# Altium PCB PCB-NODE-V1.0.PcbDoc
Units mm, origin at the board's own origin, x right, y up, seen from the top; angles counter-clockwise.
Board outline 75 x 30 mm, 2 copper layers (Top Layer, Bottom Layer); 33 components, 32 nets, 157 pads, 41 vias.
Unrouted connection lines stored in the file: 32.
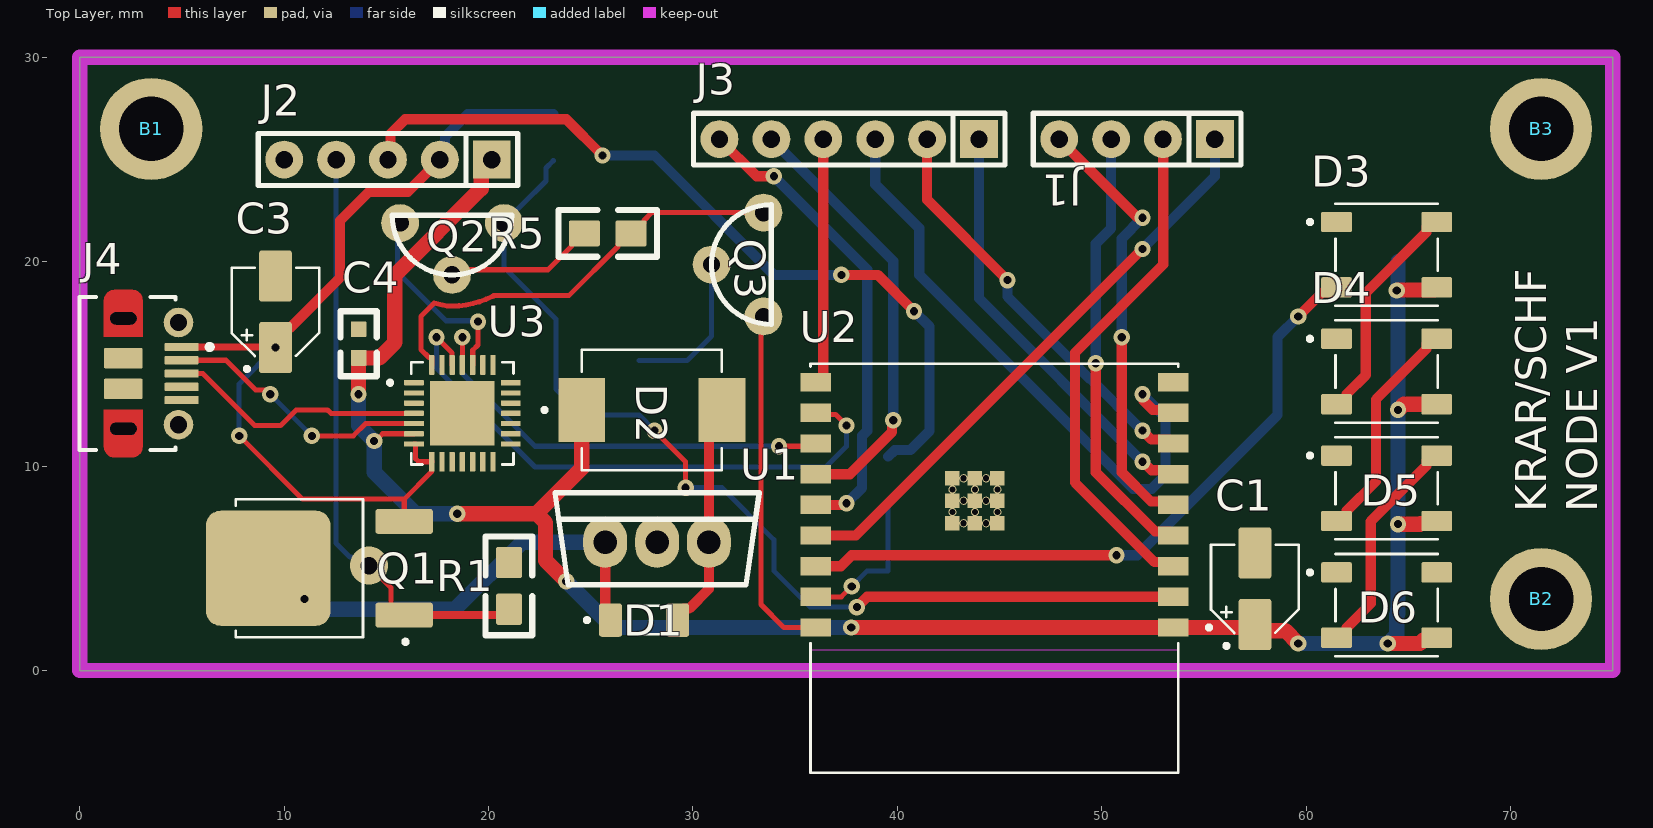
[diagram p0: Top Layer view]
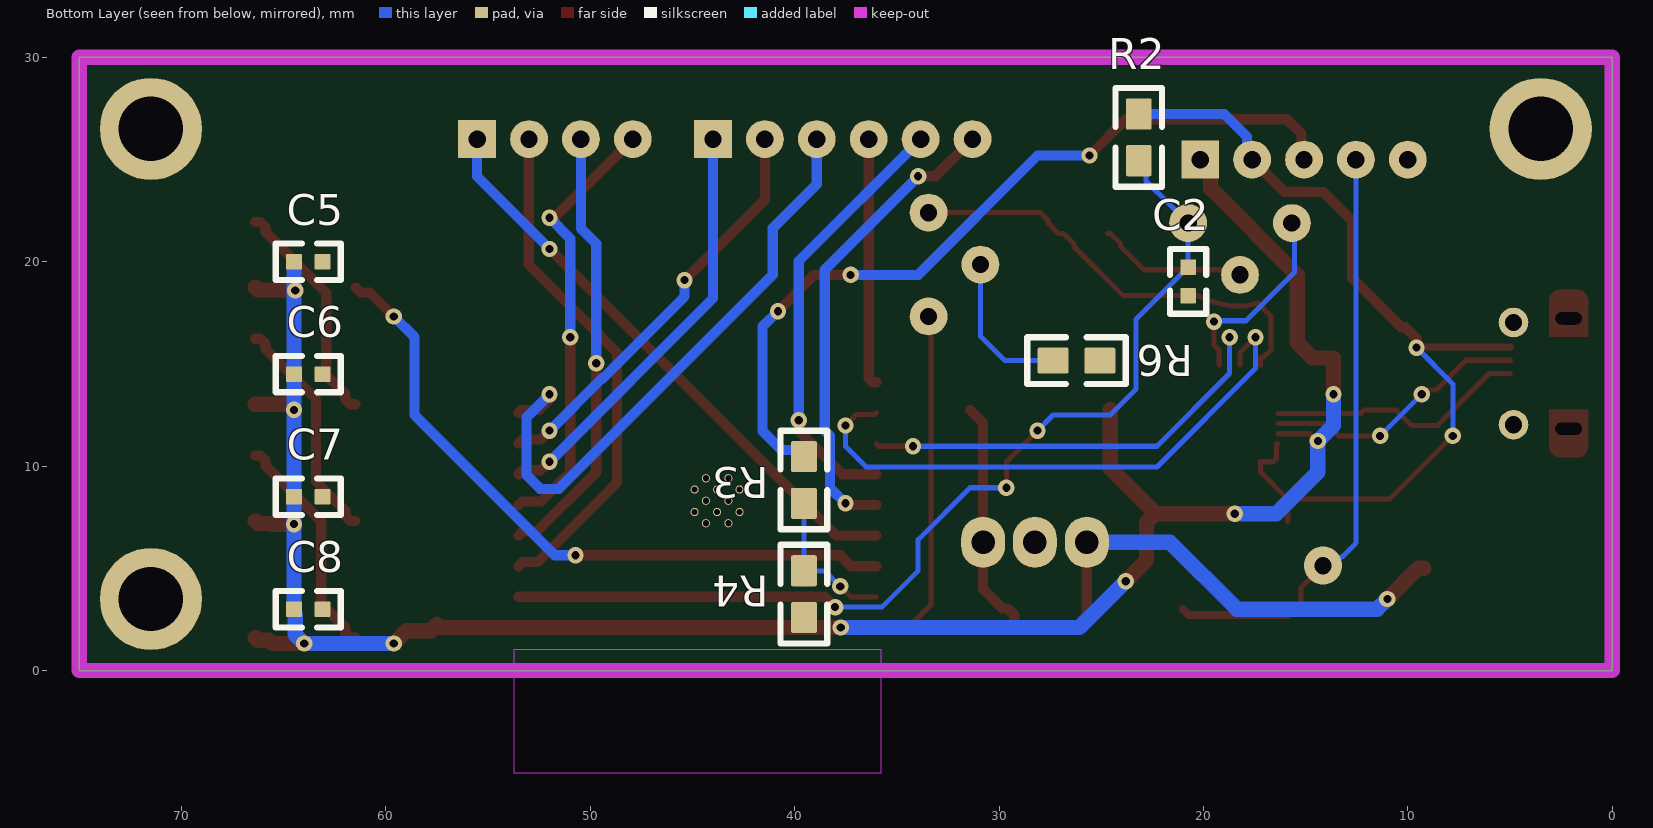
[diagram p1: Bottom Layer view, seen from below]

## Layer stack, top to bottom
Top Solder: solder mask 0.0102, Solder Resist, Dk 3.5
Top Layer: signal copper 0.0356
Dielectric 1: dielectric 0.32, FR-4, Dk 4.8
Bottom Layer: signal copper 0.0356
Bottom Solder: solder mask 0.0102, Solder Resist, Dk 3.5

## Board outline
0,0 0,30 19.25,30 75,30 75,0

## Design rules (kind name [scope] priority, off if disabled: settings)
Clearance [All] p1: gap=0.2 ignorepadtopadclearanceinfootprint=FALSE except(0.1: Arc-Arc Arc-Track Arc-SMDPad Arc-THPad Arc-Via Arc-Text Arc-Hole Track-Track Track-SMDPad Track-THPad Track-Via Track-Text Track-Hole SMDPad-SMDPad SMDPad-THPad SMDPad-Via SMDPad-Text SMDPad-Hole THPad-THPad THPad-Via THPad-Text THPad-Hole Via-Via Via-Text Via-Hole Text-Text Text-Hole)
HoleSize [All] p1: absolutevalues=TRUE maxlimit=6 minlimit=0.2 maxpercent=80.000 minpercent=20.000
MinimumAnnularRing [All] p1: minimumring=0.5
MinimumSolderMaskSliver [All] p1: minsoldermaskwidth=0
PolygonConnect [All] p1: connectstyle=Relief reliefconductorwidth=0.5 reliefentries=4 polygonreliefangle="90 Angle" airgapwidth=0.25
RoutingVias [All] p1: holewidth=0.85 width=1.85 viastyle="Through Hole" minholewidth=0.2 minwidth=0.8 maxholewidth=0.95 maxwidth=1.95
SilkToSilkClearance [All] p1: silktosilkclearance=0
SilkToSolderMaskClearance [IsPad] p1: minsilkscreentomaskgap=0 clearancetoexposedcopper=TRUE
SolderMaskExpansion [All] p1: expansion=0.102 istentingtop=FALSE
Width [All] p1: maxlimit=6 minlimit=0.2 preferedwidth=0.75
26 further rules are at their usual default settings.

## Components (designator, comment, footprint, x,y, rotation, side; value= is the part's Value field where it differs from the comment)
B1 "Schraube" "B_Schraube-M3 PAD" 3.5,26.5 r0 top
B2 "Schraube" "B_Schraube-M3 PAD" 71.5,3.5 r0 top
B3 "Schraube" "B_Schraube-M3 PAD" 71.5,26.5 r0 top
C1 "10uF" C_SMD_B-Typ 57.5,4 r90 top
C2 "100nF" C_SMD_0603 20.752,19.038 r90 bottom
C3 "10uF" C_SMD_B-Typ 9.576,17.55 r90 top
C4 "100nF" C_SMD_0603 13.64,15.99 r90 top
C5 "100nF" C_SMD_0603 63.802,20 r0 bottom
C6 "100nF" C_SMD_0603 63.802,14.5 r0 bottom
C7 "100nF" C_SMD_0603 63.802,8.5 r0 bottom
C8 "100nF" C_SMD_0603 63.802,3 r0 bottom
D1 "FDLL4148" SOD-80-2 27.61,2.465 r0 top
D2 "STPS340" D_DO-214 27.99,12.752 r0 top
D3 "#Wert" D_SMD_LED-ARGB 64.44,20.245 r180 top
D4 "#Wert" D_SMD_LED-ARGB 64.44,14.53 r180 top
D5 "#Wert" D_SMD_LED-ARGB 64.44,8.815 r180 top
D6 "#Wert" D_SMD_LED-ARGB 64.44,3.1 r180 top
J1 "#Wert" Sip-4 51.73,26 r180 top
J2 "BAT_INPUT" SIP-5 15.08,25 r180 top
J3 "IO|7-10&18-19" SIP-6 36.38,26 r180 top
J4 "MicroUSB" J-SMD-Micro-USB 3.48,14.53 r270 top
Q1 "FDD6637" FDD6637_TO-252-3 11.735,5.005 r90 top
Q2 "BC546" TO-92-3 18.212,21.896 r180 top
Q3 "BC546" TO-92-3 33.452,19.864 r90 top
R1 ">10k" R_SMD_0805 21,4.143 r270 top
R2 ">10k" R_SMD_0805 23.165,26.087 r90 bottom
R3 "22k" R_SMD_0805 39.548,9.323 r90 bottom
R4 "22k" R_SMD_0805 39.548,3.735 r90 bottom
R5 "10k" R_SMD_0805 25.832,21.388 r180 top
R6 "10k" R_SMD_0805 26.213,15.165 r0 bottom
U1 "LD33V" TO-220-3V 28.245,6.275 r0 top
U2 "ESP32-C3-WROOM-02-N4" MODULE_ESP32-C3-WROOM-02-H4 44.755,5.005 r180 top
U3 "U_CP2102" QFN50P500X500X100-29N 18.72,12.582 r0 top

## Footprints (in the part's own frame and the unit in brackets; to place one, negate y for a bottom-side part, rotate by r counter-clockwise, add the part's x,y. Pads: shape width x height; smd on the part's side, far side on the other; paste and mask are expansions set on the pad)
"B_Schraube-M3 PAD" [mm] "LB-2024-04-18"
  round 5 hole 3.15 unplated: 1(0,0)
C_SMD_0603 [mil] "LB-2024-04-17"
  rrect10% 30x30 smd paste-0.79 mask+1.97: 1(-27.5,0) 2(27.5,0)
  silkscreen extent -62,-35 62,35
C_SMD_B-Typ [mm] "LB-2024-04-16"
  rrect15% 2.5x1.6 smd paste-0.02 mask+0.05: 1(-1.75,0) 2(1.75,0)
  silkscreen extent -2.89,-2.15 2.15,2.15
D_DO-214 [mm]
  rect 2.29x3.12 smd: 1(3.43,0) 2(-3.43,0)
  silkscreen extent -5.35,-2.95 3.43,2.95
D_SMD_LED-ARGB [mm] "LB-2024-04-17"
  rrect15% 1.5x1 smd paste-0.02 mask+0.05: 1(-1.95,1.5) 2(-1.95,-1.7) 3(2.95,-1.7) 4(2.95,1.5)
  silkscreen extent -2,-2.6 4.35,2.4
FDD6637_TO-252-3 [mm]
  rrect25% 5.63x6.1 smd paste-4: D(0,2.51)
  rrect25% 1.22x2.83 smd: G(-2.29,-4.14) S(2.29,-4.14)
  silkscreen extent -3.7,-4.3 3.37,4.1
J-SMD-Micro-USB [mm] "LB-2024-04-18"
  rrect15% 0.4x1.65 smd paste-0.02 mask+0.05: 1(-1.3,1.5) 2(-0.65,1.5) 3(0,1.5) 4(0.65,1.5) 5(1.3,1.5)
  round 1.45 hole 0.85: 6(-2.5,1.35) 7(2.5,1.35)
  rrect50% 0x0 hole 0.6 slot 1.3 at 90 deg: 8(-2.7,-1.35) 11(2.7,-1.35)
  rrect15% 1x1.9 smd paste-0.02 mask+0.05: 9(-0.75,-1.35) 10(0.75,-1.35)
  Top Layer circle w0.5: c3.6,-0.9 r0.25
  Top Layer circle w0.5: c3.6,-1.8 r0.25
  Top Layer circle w0.5: c-3.6,-0.9 r0.25
  Top Layer circle w0.5: c-3.6,-1.8 r0.25
  Top Layer region: 3.6,-0.9 3.6,-1.8 4.1,-1.8 4.1,-0.9
  Top Layer region: 1.775,-0.4 1.775,-2.3 3.6,-2.3 3.6,-0.4
  Top Layer region: -3.6,-1.8 -3.6,-0.9 -4.1,-0.9 -4.1,-1.8
  Top Layer region: -1.8,-2.3 -1.8,-0.4 -3.6,-0.4 -3.6,-2.3
  silkscreen extent -3.75,-3.5 3.75,3
MODULE_ESP32-C3-WROOM-02-H4 [mm]
  rect 1.5x0.9 smd: 1(-8.75,2.9) 2(-8.75,1.4) 3(-8.75,-0.1) 4(-8.75,-1.6) 5(-8.75,-3.1) 6(-8.75,-4.6) 7(-8.75,-6.1) 8(-8.75,-7.6) 9(-8.75,-9.1) 10(8.75,-9.1) 11(8.75,-7.6) 12(8.75,-6.1) 13(8.75,-4.6) 14(8.75,-3.1) 15(8.75,-1.6) 16(8.75,-0.1) 17(8.75,1.4) 18(8.75,2.9)
  rect 0.7x0.7 smd: 19(-0.14,-2.2) 20(0.96,-2.2) 21(2.06,-2.2) 22(-0.14,-3.3) 23(0.96,-3.3) 24(2.06,-3.3) 25(-0.14,-4.4) 26(0.96,-4.4) 27(2.06,-4.4)
  round 0.4 hole 0.3 mask+0: 28(0.41,-2.2) 29(1.51,-2.2) 30(-0.14,-2.75) 31(0.96,-2.75) 32(2.06,-2.75) 33(0.41,-3.3) 34(1.51,-3.3) 35(-0.14,-3.85) 36(0.96,-3.85) 37(2.06,-3.85) 38(0.41,-4.4) 39(1.51,-4.4)
  Keep-Out Layer region: 9,4 -9,4 -9,10 9,10
  Keep-Out Layer region: 9,4 -9,4 -9,10 9,10
  silkscreen extent -10.6,-10 9,10, body extent -9,-10 9,10, height 3.35
QFN50P500X500X100-29N [mm]
  rrect25% 0.97x0.26 smd: 1(-2.37,1.5) 2(-2.37,1) 3(-2.37,0.5) 4(-2.37,0) 5(-2.37,-0.5) 6(-2.37,-1) 7(-2.37,-1.5) 15(2.37,-1.5) 16(2.37,-1) 17(2.37,-0.5) 18(2.37,0) 19(2.37,0.5) 20(2.37,1) 21(2.37,1.5)
  rrect25% 0.26x0.97 smd: 8(-1.5,-2.37) 9(-1,-2.37) 10(-0.5,-2.37) 11(0,-2.37) 12(0.5,-2.37) 13(1,-2.37) 14(1.5,-2.37) 22(1.5,2.37) 23(1,2.37) 24(0.5,2.37) 25(0,2.37) 26(-0.5,2.37) 27(-1,2.37) 28(-1.5,2.37)
  rect 3.15x3.15 smd paste-0.575: 29(0,0)
  silkscreen extent -3.64,-2.5 2.5,2.5
R_SMD_0805 [mil] "LB-2024-04-17"
  rrect15% 60x50 smd paste-0.79 mask+1.97: 1(-45,0) 2(45,0)
  silkscreen extent -95,-45 95,45
Sip-4 [mm] "LB-2024-04-17"
  rect 1.85x1.85 hole 0.85: 1(-3.81,0)
  round 1.85 hole 0.85: 2(-1.27,0) 3(1.27,0) 4(3.81,0)
  silkscreen extent -5.08,-1.27 5.08,1.27
SIP-5 [mm] "LB-2024-04-17"
  rect 1.85x1.85 hole 0.85: 1(-5.08,0)
  round 1.85 hole 0.85: 2(-2.54,0) 3(0,0) 4(2.54,0) 5(5.08,0)
  silkscreen extent -6.35,-1.27 6.35,1.27
SIP-6 [mm] "LB-2024-04-17"
  rect 1.85x1.85 hole 0.85: 1(-7.62,0)
  round 1.85 hole 0.85: 2(-5.08,0) 3(-2.54,0) 4(0,0) 5(2.54,0) 6(5.08,0)
  silkscreen extent -8.89,-1.27 6.35,1.27
SOD-80-2 [mm] "SMD-Dioden Footprint z.b.: FDLL4148"
  rrect25% 1.14x1.63 smd: 1(1.64,0) 2(-1.64,0)
  silkscreen extent -2.89,-0.7 0.75,0.7
TO-92-3 [mm] "LB-2024-04-17"
  round 1.85 hole 0.85: 1(0,2.54) 2(2.54,0) 3(-2.54,0)
  silkscreen extent -2.93,-0.38 2.92,2.54
TO-220-3V [mm] "LB-2024-04-17"
  oval 2.15x2.5 hole 1.15: 1(-2.54,0) 2(2.54,0) 3(0,0)
  silkscreen extent -5,-2.07 5,2.42

## Part data
B1 B2 B3: library part B_Schraube, "Schraubenloch für M3 Schrauben"
C1 C3: library part C_SMD_ELK, "SMD Elektrolytkondensator"
C2 C4 C5 C6 C7 C8: library part C_SMD_KO, "Kondensator SMD Universal, Keramik, Folie, usw."
D1: library part D_SMD_Silizium, "Diode SMD Silizium", Spannung For.=0,7V
D2: library part D_SMD_Schottky, "Diode SMD Schottky", Spannung Rev.=0,4V
D3 D4 D5 D6: library part D_SMD_LED-ARGB, "Diode SMD ARGB"
J1: library part J_THT_CON4, "Stecker"
J2: library part J_THT_CON5, "Stecker"
J3: library part J_THT_CON6, "Stecker"
J4: library part J_SMD_µ-USB, "Micro USB Buchse"
Q1: library part Q_SMD_MOSFET-P-Kanal, "P-Kanal MOSFET", Package="TO-220-3 Infineon", Check_prices=https://www.snapeda.com/parts/IRFZ44NPBF/Infineon+Technologies/view-part/?ref=eda, Digi-Key_Part_Number=IRFZ44NPBF-ND, MF=Infineon, MP=IRFZ44NPBF, Purchase-URL=https://pricing.snapeda.com/search/part/IRFZ44NPBF/?ref=eda, SnapEDA_Link=https://www.snapeda.com/parts/IRFZ44NPBF/Infineon+Technologies/view-part/?ref=snap
Q2 Q3: library part Q_SMD_NPN, "NPN Transistor"
R1 R2 R3 R4 R5 R6: library part R_SMD_Widerstand, "Widerstand SMD"
U1: library part U_THT_78xx, "Linearwandler"
U2: "WiFi Modules (802.11) (Engineering Samples) SMD module, ESP32-C3, 4MB SPI flash, PCB antenna, -40 C +85 C", Package=Package, Availability="In Stock", Check_prices=https://www.snapeda.com/parts/ESP32-C3-WROOM-02-N4/Espressif+Systems/view-part/?ref=eda, MF="Espressif Systems", MP=ESP32-C3-WROOM-02-N4, Price=None, Purchase-URL=https://pricing.snapeda.com/search/part/ESP32-C3-WROOM-02-N4/?ref=eda, SnapEDA_Link=https://www.snapeda.com/parts/ESP32-C3-WROOM-02-N4/Espressif+Systems/view-part/?ref=snap
U3: "CP2102N USB 2.0 to UART (RS232) Bridge Interface Evaluation Board", Package="WFQFN-20 Silicon Labs", Availability="In Stock", Check_prices=https://www.snapeda.com/parts/CP2102/Silicon+Labs/view-part/?ref=eda, MF="Silicon Labs", MP=CP2102, Price=None, Purchase-URL=https://pricing.snapeda.com/search/part/CP2102/?ref=eda, SnapEDA_Link=https://www.snapeda.com/parts/CP2102/Silicon+Labs/view-part/?ref=snap

## Via types
v1: diameter 0.8, hole 0.4, Top Layer to Bottom Layer, 40 vias
v2: diameter 1.85, hole 0.85, Top Layer to Bottom Layer, 1 vias

## Nets (pads, with @x,y where several pads share a name; then routed paths per layer and width w, separated by ;. In a path a pad name is that pad's centre, name@x,y a point inside that pad or via, vN(x,y) a via of type N, cw(c..) or ccw(c..) an arc to the next point about the centre after c; other vN are vias at no path point)
3,3V: C1.1 C4.1 C5.2 C6.2 C7.2 C8.2 D2.2 D3.1 D4.1 D5.1 D6.1 J2.1 U2.1 U3.6 | length 108.7
  Top Layer w0.25: v1(14.402,11.228) 14.469,11.228 14.823,11.582 U3.6
  Top Layer w0.75: v1(13.64,13.514) C4.1 14.656,15.292 15.418,16.054 15.418,19.356 19.641,23.579 19.641,24.481 J2.1 ; v1(18.466,7.672) 22.345,7.672 ; v1(23.8,4.37) 22.784,5.386 22.784,7.233 22.345,7.672 ; D2.2 24.56,9.887 22.345,7.672 ; v1(37.743,2.102) 37.746,2.105 U2.1 57.355,2.105 C1.1 57.8,1.95 58.986,1.95 v1(59.614,1.322) ; v1(64.001,1.322) 65.576,1.322 65.729,1.475 66.265,1.475 D6.1 ; v1(64.44,18.594) 64.454,18.594 64.48,18.62 66.265,18.62 D3.1 ; v1(64.5,7.164) 65.576,7.164 65.602,7.19 66.265,7.19 D5.1 ; v1(64.5,12.752) 64.514,12.752 64.792,13.03 D4.1
  Bottom Layer w0.75: v1(13.64,13.514) 13.64,11.99 v1(14.402,11.228) 14.402,9.704 16.434,7.672 v1(18.466,7.672) ; v1(23.8,4.37) 26.068,2.102 v1(37.743,2.102) ; v1(59.614,1.322) v1(64.001,1.322) 64.44,1.761 64.44,2.731 64.494,2.785 64.494,2.994 C8.2 v1(64.5,7.164) C7.2 v1(64.5,12.752) 64.5,18.52 64.44,18.58 64.44,18.608 64.5,18.668 C5.2
ARGB: D3.4 U2.16 | length 33.4
  Top Layer w0.5: U2.16 37.235,5.105 37.77,5.64 v1(50.724,5.64) ; v1(59.614,17.324) 60.785,18.495 61.24,18.495 D3.4
  Bottom Layer w0.5: v1(50.724,5.64) 51.74,5.64 58.598,12.498 58.598,16.308 v1(59.614,17.324)
BAT-CHECK: R3.1 R4.2 U2.17 | length 7.4
  Top Layer w0.25: U2.17 37.259,3.605 v1(37.77,4.116)
  Bottom Layer w0.25: v1(37.77,4.116) 38.532,4.878 R4.2 R3.1
EN-MODUL: J2.4 Q1.G R1.2 | length 29.3
  Top Layer w0.25: v2(14.148,5.132) 15.218,4.062 15.218,3.198 15.701,2.715 Q1.G
  Top Layer w0.381: Q1.G 20.715,2.715 R1.2
  Bottom Layer w0.25: J2.4 12.54,6.232 13.225,5.547 13.3,5.547 13.715,5.132 v2(14.148,5.132)
GND: C1.2 C2.1 C3.2 C4.2 C5.1 C6.1 C7.1 C8.1 D3.3 D4.3 D5.3 D6.3 J2.5 J4.5 J4.6 J4.7 J4.8 J4.9 J4.10 J4.11 R1.1 R4.1 U1.3 U2.9 U2.19 U2.20 U2.21 U2.22 U2.23 U2.24 U2.25 U2.26 U2.27 U2.28 U2.29 U2.30 U2.31 U2.32 U2.33 U2.34 U2.35 U2.36 U2.37 U2.38 U2.39 U3.3 U3.29
NetC2_2: C2.2 Q2.3 R2.1 U2.2 | length 49.7
  Top Layer w0.25: v1(28.118,11.736) 29.642,10.212 v1(29.642,8.942)
  Top Layer w0.5: v1(38.024,3.1) 38.529,3.605 U2.2
  Bottom Layer w0.25: R2.1 22.809,24.588 22.809,23.953 21.641,22.785 Q2.3 C2.2 23.292,17.197 23.292,13.768 24.562,12.498 27.356,12.498 v1(28.118,11.736) ; v1(29.642,8.942) 31.42,8.942 33.96,6.402 33.96,4.878 35.738,3.1 v1(38.024,3.1)
NetD1_1: D1.1 D2.1 U1.2 | length 11.3
  Top Layer w0.5: D1.1 29.25,2.71 29.57,3.03 29.815,3.03 30.785,4 U1.2 30.785,12.117 D2.1
NetD1_2: D1.2 Q1.D U1.1 | length 22.6
  Top Layer w0.5: U1.1 25.705,2.73 D1.2
  Top Layer w0.75: Q1.D 9.495,5.005 v1(11,3.5)
  Bottom Layer w0.75: v1(11,3.5) 11.5,3 18.366,3 21.641,6.275 U1.1
NetD3_2: D3.2 D4.4 | length 11.2
  Top Layer w0.5: D4.4 61.74,13.03 61.99,13.28 61.99,13.53 62.916,14.456 62.916,18.471 65.89,21.445 65.89,21.695 66.14,21.945 D3.2
NetD4_2: D4.2 D5.4 | length 11.2
  Top Layer w0.5: D5.4 61.74,7.315 61.99,7.565 61.99,7.815 63.424,9.249 63.424,13.264 65.89,15.73 65.89,15.98 66.14,16.23 D4.2
NetD5_2: D5.2 D6.4 | length 11.2
  Top Layer w0.5: D6.4 61.74,1.6 61.99,1.85 61.99,2.1 63.17,3.28 63.17,7.295 65.89,10.015 65.89,10.265 66.14,10.515 D5.2
NetJ1_1: J1.1 U2.15 | length 28.6
  Top Layer w0.5: U2.15 37.973,6.605 v1(51.994,20.626)
  Bottom Layer w0.5: v1(51.994,20.626) 55.54,24.172 J1.1
NetJ1_2: J1.2 U2.3 | length 25.1
  Top Layer w0.5: J1.2 53.01,25.99 53.01,19.864 48.692,15.546 48.692,9.196 52.583,5.305 53.305,5.305 U2.3
  Bottom Layer w0.5: J1.2 J1.2@53.01,25.99
NetJ1_3: J1.3 U2.4 | length 21.7
  Top Layer w0.5: v1(49.708,15.038) 49.708,9.704 52.607,6.805 53.305,6.805 U2.4
  Bottom Layer w0.5: v1(49.708,15.038) 49.708,20.88 50.46,21.632 J1.3
NetJ1_4: J1.4 U2.5 | length 21.7
  Top Layer w0.5: J1.4 51.713,22.207 51.937,22.207 v1(51.994,22.15) ; v1(50.978,16.308) 50.978,9.704 52.411,8.271 53.339,8.271 U2.5
  Bottom Layer w0.5: v1(50.978,16.308) 50.978,21.134 v1(51.994,22.15)
NetJ3_1: J3.1 U2.6 | length 20.9
  Top Layer w0.5: v1(51.994,10.212) 52.022,10.212 52.437,9.798 53.312,9.798 U2.6
  Bottom Layer w0.5: J3.1 44,18.206 v1(51.994,10.212)
NetJ3_2: J3.2 U2.7 | length 20.4
  Top Layer w0.5: J3.2 41.46,23.032 v1(45.39,19.102) ; v1(51.994,11.736) 51.998,11.736 52.437,11.298 53.312,11.298 U2.7
  Bottom Layer w0.5: v1(45.39,19.102) 45.39,18.295 49.397,14.288 49.442,14.288 v1(51.994,11.736)
NetJ3_3: J3.3 U2.8 | length 30.7
  Top Layer w0.5: v1(51.994,13.514) 52.051,13.457 52.051,13.203 52.502,12.752 53.358,12.752 U2.8
  Bottom Layer w0.5: J3.3 38.92,23.794 41.072,21.642 41.072,19.356 51.541,8.887 52.447,8.887 53.118,9.558 53.118,12.39 v1(51.994,13.514)
NetJ3_4: J3.4 U2.10 | length 12.2
  Top Layer w0.5: U2.10 36.18,14.105 36.38,14.305 J3.4
NetJ3_5: J3.5 U2.13 | length 21.4
  Top Layer w0.5: U2.13 37.671,9.605 39.745,11.679 39.745,12.187 v1(39.802,12.244)
  Bottom Layer w0.5: J3.5 39.802,20.038 v1(39.802,12.244)
NetJ3_6: J3.6 U2.14 | length 23.3
  Top Layer w0.5: J3.6 33.118,24.182 v1(33.96,24.182) ; U2.14 37.36,8.105 37.435,8.18 v1(37.516,8.18)
  Bottom Layer w0.5: v1(33.96,24.182) 38.532,19.61 38.532,11.736 38.278,11.482 38.278,8.942 v1(37.516,8.18)
NetJ4_2: J4.2 U3.5 | length 13.2
  Top Layer w0.25: J4.2 7.148,15.18 8.594,13.734 9.102,13.734 v1(9.322,13.514) ; v1(11.354,11.482) 13.386,11.482 13.986,12.082 U3.5
  Bottom Layer w0.25: v1(9.322,13.514) v1(11.354,11.482)
NetJ4_3: J4.3 U3.4 | length 12.8
  Top Layer w0.25: J4.3 6.02,14.53 8.56,11.99 9.83,11.99 10.592,12.752 12.116,12.752 12.286,12.582 U3.4
NetQ2_1: Q2.1 R5.2 | length 7.4
  Top Layer w0.25: Q2.1@18.085,19.61 22.911,19.61 24.052,20.751 24.052,20.878 24.562,21.388 R5.2
NetQ2_2: Q2.2 R6.1 U3.24 | length 9.8
  Top Layer w0.25: U3.24 19.225,14.957 19.225,15.675 19.482,15.932 v1(19.482,17.07)
  Bottom Layer w0.25: Q2.2@15.545,22.15 15.545,19.483 17.914,17.114 19.438,17.114 v1(19.482,17.07)
NetQ3_1: Q3.1 R6.2 | length 7.6
  Bottom Layer w0.25: R6.2 29.717,15.165 30.912,16.36 Q3.1
NetQ3_2: Q3.2 R5.1 U3.28 | length 21.6
  Top Layer w0.25: U3.28 17.22,15.307 17.215,15.312 17.088,15.312 16.688,15.712 16.688,17.324 17.337,17.973 17.744,17.883 ccw(c18.212,20.003) 18.212,17.832 ccw(c18.212,22.192) 20.193,18.308 20.253,18.339 20.316,18.34 23.927,18.34 26.338,20.751 26.338,20.878 26.848,21.388 R5.1 27.102,21.388 27.612,21.898 27.612,22.025 27.991,22.404 Q3.2
NetQ3_3: Q3.3 U2.18 | length 17.3
  Top Layer w0.25: Q3.3 33.325,17.197 33.325,3.227 34.447,2.105 U2.18
NetU2_11: U2.11 U3.26 | length 28.5
  Top Layer w0.25: v1(17.45,16.308) 18.215,15.543 18.215,14.957 U3.26 ; U2.11 36.088,12.522 36.984,12.522 v1(37.516,11.99)
  Bottom Layer w0.25: v1(17.45,16.308) 17.45,14.784 22.276,9.958 36.5,9.958 37.516,10.974 v1(37.516,11.99)
NetU2_12: U2.12 U3.25 | length 21.9
  Top Layer w0.25: U3.25 v1(18.72,16.308) ; v1(34.214,10.974) 35.874,10.974 U2.12
  Bottom Layer w0.25: v1(18.72,16.308) 18.72,14.53 22.276,10.974 v1(34.214,10.974)
V_BAT: J2.3 R3.2 | length 39.8
  Top Layer w0.5: J2.3 15.199,25.119 15.199,26.249 15.926,26.976 23.8,26.976 v1(25.578,25.198) ; v1(37.262,19.356) 39.04,19.356 v1(40.818,17.578)
  Bottom Layer w0.5: v1(25.578,25.198) 28.118,25.198 33.96,19.356 v1(37.262,19.356) ; R3.2 39.868,10.786 40.63,10.786 41.58,11.736 41.58,16.816 v1(40.818,17.578)
VBUS: C3.1 J2.2 J4.1 Q1.S R2.2 U3.7 U3.8 | length 44.8
  Top Layer w0.25: v1(7.798,11.482) 10.897,8.383 15.875,8.383 ; Q1.S 15.875,8.383 ; U3.7 16.429,11.082 16.434,11.077 16.434,10.358 16.58,10.212 U3.8 17.215,10.207 17.215,9.723 15.875,8.383
  Top Layer w0.35: J4.1 C3.1@9.546,15.83
  Top Layer w0.5: v1(9.576,15.8) 9.576,16.25 10.126,16.8 10.322,16.8 12.734,19.212 12.734,22.006 14.148,23.42 15.012,23.42 15.017,23.425 16.045,23.425 J2.2
  Bottom Layer w0.25: v1(7.798,11.482) 7.798,14.022 v1(9.576,15.8)
  Bottom Layer w0.5: J2.2 17.866,25.246 17.866,26.122 18.974,27.23 R2.2
pads on no net: B1.1 B2.1 B3.1 D6.2 J4.4 U3.1 U3.2 U3.9 U3.10 U3.11 U3.12 U3.13 U3.14 U3.15 U3.16 U3.17 U3.18 U3.19 U3.20 U3.21 U3.22 U3.23 U3.27

## Keep-outs
Keep-Out Layer:
  lines w0.75: 0,0 0,12.5 0,28.5 0,30 19.25,30 56.75,30 75,30 75,0 56.25,0 46.875,0 28.125,0 18.75,0 0,0

## Silkscreen, mask and mechanical layers (free items; w line width, h text height)
Top Overlay:
  text "KRAR/SCHF" at 71.746,7.754 h1.52 r90
  text "NODE V1" at 74.246,7.754 h1.52 r90
Bemaßung:
  lines w0.254: 0,31.246 0,31.754 ; 1.524,30.992 0,31.5 ; 1.524,32.008 0,31.5 ; 32.396,31.5 0,31.5 ; 42.604,31.5 75,31.5 ; 73.476,30.992 75,31.5 ; 73.476,32.008 75,31.5 ; 75,31.246 75,31.754 ; 78.992,1.524 79.5,0 ; 78.992,28.476 79.5,30 ; 79.246,0 79.754,0 ; 79.246,30 79.754,30 ; 79.5,9.896 79.5,0 ; 79.5,20.104 79.5,30 ; 80.008,1.524 79.5,0 ; 80.008,28.476 79.5,30
  text "75 (mm)" at 32.65,30.586 h1.52
  text "30 (mm)" at 80.414,10.15 h1.52 r90